# EAGLE board dengenver2.0 (EAGLE 9.6.2)
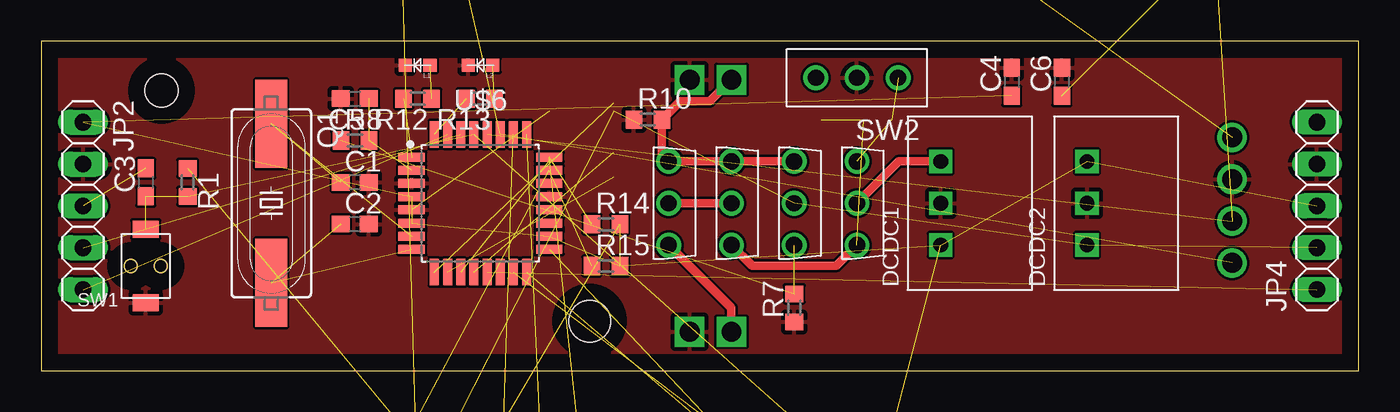
[diagram p0: board, top side]
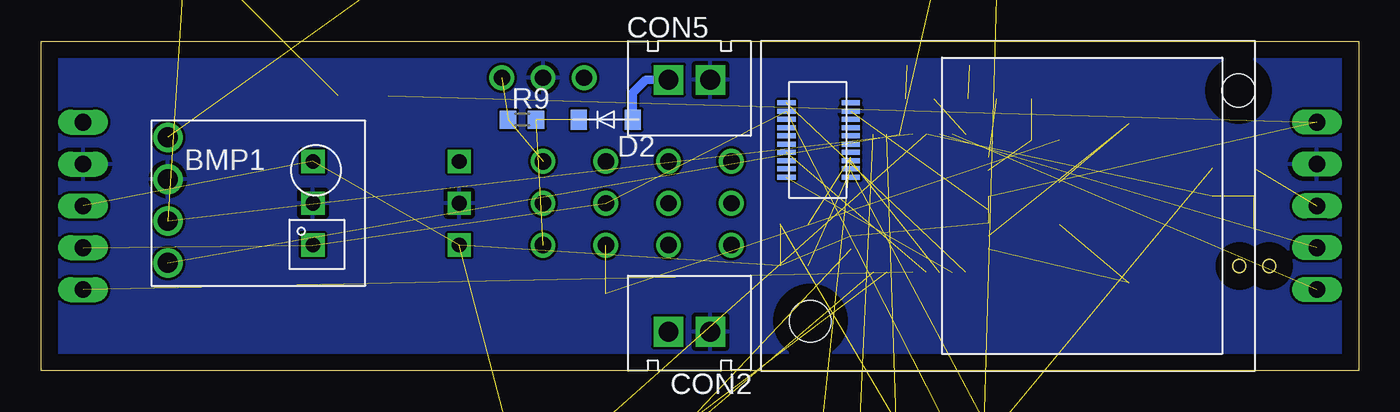
[diagram p1: board, bottom side, seen from below]

Size 80 x 20 mm. Coordinates in mm from the lower left corner, seen from the top.
Outline: 0,0 80,0 80,20 0,20 0,0
Copper layers (1*16): Top 0.035mm / dielectric 1.5mm / Bottom 0.035mm
Design rules "default": minimum track width 6mil, minimum drill 0.35mm, track to track 6mil, track to pad 6mil, pad to pad 6mil, via to via 6mil, smd to smd 6mil, copper to edge 40mil, drill to drill 6mil, minimum pad ring 10mil, minimum via ring 8mil, stop-mask expansion 4mil, vias tented up to drill 0mil, thermal gap 10mil
Net classes: 0 default: width 0.406 mm

## Footprints (pad centres in the part's own frame; a part is rotated, then mirrored left to right if it is on the bottom)
GY-68 = drill 1.2: P1 -5,4; P2 -5,1.46; P3 -5,-1.08; P4 -5,-3.62
C1608 = smd 1.1 x 1: 1 -0.85,0; 2 0.85,0
2PIN = drill 1.2 square: P$1 -1.27,0; P$2 1.27,0
SOD-123 = smd 0.97 x 1.22: A 1.64,0; C -1.64,0
5V1A_M78AR05-1 = drill 0.9 pad 1.27 square: GND 0,0; VIN 2.54,0; VOUT -2.54,0
3.3V1A_M78AR033-1 = drill 0.9 pad 1.27 square: GND 0,0; VIN 2.54,0; VOUT -2.54,0
IM920_IM920C = smd 0.3 x 1.1: $P1 -1.75,-13.45; $P2 -1.75,-9.55; $P3 -2.25,-13.45; $P4 -2.25,-9.55; $P5 -2.75,-13.45; $P6 -2.75,-9.55; $P7 -3.25,-13.45; $P8 -3.25,-9.55; $P9 -3.75,-13.45; $P10 -3.75,-9.55; $P11 -4.25,-13.45; $P12 -4.25,-9.55; $P13 -4.75,-13.45; $P14 -4.75,-9.55; $P15 -5.25,-13.45; $P16 -5.25,-9.55; $P17 -5.75,-13.45; $P18 -5.75,-9.55; $P19 -6.25,-13.45; $P20 -6.25,-9.55 | hole 2.5: 7,-12 | hole 2: -7,14
1X06 = drill 1.016 long: 1 -6.35,0; 2 -3.81,0; 3 -1.27,0; 4 1.27,0; 5 3.81,0; 6 6.35,0
1X05 = drill 1.016 long: 1 -5.08,0; 2 -2.54,0; 3 0,0; 4 2.54,0; 5 5.08,0
1X07 = drill 1.016 long: 1 -7.62,0; 2 -5.08,0; 3 -2.54,0; 4 0,0; 5 2.54,0; 6 5.08,0; 7 7.62,0
OSXX1608C1A = smd 0.8 x 0.8: AN -0.75,0; CT 0.75,0
HC49UP = smd 5.334 x 1.93: 1 -4.826,0; 2 4.826,0
R0603 = smd 1 x 1.1: 1 -0.85,0; 2 0.85,0
TVAF06-A020B-R = smd 1.6 x 1.05: P$1 0,2.225; P$2 0,-2.225
SRIDE_SWITCH = drill 1: L -2.5,0; LR 0,0; R 2.5,0
2SJ681 = drill 1: DRAIN 0,0; GATE 2.54,0; SOURCE -2.54,0
2SK4017 = drill 1: DRAIN 0,0; GATE 2.54,0; SOURCE -2.54,0
QFP80P900X900X120-32N = smd 1.6 x 0.547: ADC6 4.181,-1.2; ADC7 4.181,1.2; AREF 4.181,-0.4; AVCC 4.181,-2; GND1 -4.181,1.2; GND2 -4.181,-0.4; GND3 4.181,0.4; PB5 4.181,-2.8; PB6 -4.181,-2; PB7 -4.181,-2.8; PC0 4.181,2; PC1 4.181,2.8; PD3 -4.181,2.8; PD4 -4.181,2; VCC1 -4.181,0.4; VCC2 -4.181,-1.2 | smd 0.547 x 1.6: PB0 -0.4,-4.181; PB1 0.4,-4.181; PB2 1.2,-4.181; PB3 2,-4.181; PB4 2.8,-4.181; PC2 2.8,4.181; PC3 2,4.181; PC4 1.2,4.181; PC5 0.4,4.181; PC6 -0.4,4.181; PD0 -1.2,4.181; PD1 -2,4.181; PD2 -2.8,4.181; PD5 -2.8,-4.181; PD6 -2,-4.181; PD7 -1.2,-4.181

## Placement (x,y rotation side)
BMP1  BMP180  [GY-68]  67.31,10.16 0 bottom
C1  22p  [C1608]  19.05,11.43 0 top
C2  22p  [C1608]  19.05,8.89 0 top
C3  0.1μ  [C1608]  6.35,11.43 90 top
C4  3.3uF  [C1608]  58.93,17.53 90 top
C5  10uF  [C1608]  19.05,16.51 180 top
C6  3.3uF  [C1608]  61.98,17.53 90 top
CON2  [2PIN]  40.64,2.36 180 bottom
CON5  [2PIN]  40.64,17.65 0 bottom
D2  [SOD-123]  45.72,15.24 180 bottom
DCDC1  [5V1A_M78AR05-1]  54.61,10.16 90 top
DCDC2  [3.3V1A_M78AR033-1]  63.5,10.16 90 top
IM2  IM920_IM920C  [IM920_IM920C]  21.3,10 270 bottom
JP1  [1X06]  54.61,-16.51 0 top  (outside the outline)
JP2  [1X05]  2.54,10 270 top
JP3  [1X07]  27.94,-7.62 0 top  (outside the outline)
JP4  [1X05]  77.46,10 90 top
L1  [OSXX1608C1A]  22.86,18.54 180 top
L2  [OSXX1608C1A]  26.67,18.54 180 top
Q1  16mhz  [HC49UP]  13.97,10.16 270 top
R1  10k  [R0603]  8.89,11.43 270 top
R4  10k  [R0603]  20.32,50.8 0 top  (outside the outline)
R7  10k  [R0603]  45.72,3.81 90 top
R8  1k  [R0603]  19.05,13.97 0 top
R9  100k  [R0603]  50.8,15.24 0 bottom
R10  1k  [R0603]  36.83,15.24 0 top
R11  10k  [R0603]  71.12,26.67 270 top  (outside the outline)
R12  100  [R0603]  22.86,16.51 180 top
R13  100  [R0603]  26.67,16.51 180 top
R14  4.7k  [R0603]  34.29,8.89 0 top
R15  4.7k  [R0603]  34.29,6.35 0 top
SW1  [TVAF06-A020B-R]  6.35,6.35 180 top
SW2  SRIDE_SWITCH  [SRIDE_SWITCH]  49.53,17.78 180 top
U$2  2SJ681-PCH  [2SJ681]  38.1,10.16 90 top
U$3  2SK4017-NCH  [2SK4017]  45.72,10.16 90 top
U$4  2SJ681-PCH  [2SJ681]  41.91,10.16 90 top
U$5  2SJ681-PCH  [2SJ681]  49.53,10.16 90 top
U$6  ATMEGA328P-AU  [QFP80P900X900X120-32N]  26.67,10.16 0 top

## Library data of the parts
BMP1 = BMP180
C1-C6 = rcl; SPICEPREFIX: C
CON2 CON5 = XR Connector
D2 = ChipDiodes
DCDC1 DCDC2 = DC-DC
IM2 = CANSAT12th
JP1-JP4 = pinhead
L1 L2 = Chip LED
Q1 = crystal; OC_FARNELL: unknown; OC_NEWARK: unknown
R1 R4 R7-R15 = rcl; SPICEPREFIX: R
SW1 = Tact switch
SW2 = Sride Switch
U$2-U$5 = mosfet
U$6 = ATMEGA328P-AU

## Nets
+3V3: BMP1.P1 C6.1 DCDC2.VOUT IM2.$P17 JP3.2 JP4.2 R4.2 R11.2 U$3.DRAIN
+5V: C4.1 DCDC1.VOUT DCDC2.VIN JP1.1 JP2.1 JP3.3 JP4.3 R1.1 R14.2 R15.2 U$6.AVCC U$6.VCC1 U$6.VCC2
+5V1: DCDC1.VIN U$5.DRAIN
BORD1: JP4.5
BORD2: JP4.1 U$6.PB1
BORDRX: JP3.4 U$6.PC3
BORDTX: JP3.5 U$6.PC2
FP: CON5.P$1 D2.C R10.2 U$2.GATE U$3.GATE U$4.GATE
FP_CHECKER: C5.1 R8.2 U$6.PD4
GND: BMP1.P2 C1.2 C2.2 C4.2 C5.2 C6.2 CON2.P$1 CON5.P$2 DCDC1.GND DCDC2.GND IM2.$P18 JP1.2 JP2.2 JP3.7 JP4.4 L1.CT L2.CT R7.1 R10.1 SW1.P$1 SW2.LR U$6.GND1 U$6.GND2 U$6.GND3
IM_BUSY: IM2.$P1 U$6.PD6
IM_RESET: IM2.$P19 U$6.PD5
LED: IM2.$P15
LED1.0: R13.2 U$6.PD2
LED1.1: R12.2 U$6.PD3
MISO: JP1.4 U$6.PB4
MOSI: JP1.5 U$6.PB3
N$1: C2.1 Q1.2 U$6.PB7
N$2: U$2.DRAIN U$4.DRAIN
N$3: D2.A R9.2 U$4.SOURCE U$5.SOURCE
N$9: L2.AN R13.1
N$10: L1.AN R12.1
N$12: C1.1 Q1.1 U$6.PB6
N$14: R7.2 R8.1 U$3.SOURCE
RAW: CON2.P$2 U$2.SOURCE
RESET: C3.2 JP2.3
RESETB: C3.1 JP1.6 R1.2 SW1.P$2 U$6.PC6
RX: JP2.4 U$6.PD0
RX_IM: IM2.$P6 U$6.PD7
SCK: JP1.3 U$6.PB5
SCL: BMP1.P3 R11.1 U$6.PC5
SDA: BMP1.P4 R4.1 U$6.PC4
SERVO: JP3.6 R14.1 U$6.PC1
SERVO2: JP3.1 R15.1 U$6.PC0
SS: U$6.PB2
SW: R9.1 SW2.L U$5.GATE
TX: JP2.5 U$6.PD1
TX_IM: IM2.$P7 U$6.PB0

## Tracks (layer width: path | path; a pad name or v marks a point on that pad's centre or on a via)
+3V3  (8 unrouted)
+5V  (12 unrouted)
+5V1
  Top 0.508: U$5.DRAIN 52.07,12.7 DCDC1.VIN
BORD2  (1 unrouted)
BORDRX  (1 unrouted)
BORDTX  (1 unrouted)
FP
  Top 0.508: U$3.GATE U$4.GATE U$2.GATE 37.68,13.12 R10.2 38.79,16.35 40.6,16.35 CON5.P$1
  Bottom 0.508: D2.C 44.08,16.88 43.31,17.65 CON5.P$1
FP_CHECKER  (2 unrouted)
GND  (1 unrouted)
  pour Top: -49.53,-29.21 -83.82,5.08 -83.82,50.8 -83.82,71.12 -60.96,93.98 60.96,93.98 106.68,48.26 106.68,8.89 73.66,-24.13 68.58,-29.21 -48.26,-29.21
  pour Bottom: -49.53,-29.21 -83.82,5.08 -83.82,71.12 -60.96,93.98 59.69,93.98 60.96,93.98 106.68,48.26 106.68,8.89 68.58,-29.21
IM_BUSY  (1 unrouted)
IM_RESET  (1 unrouted)
LED1.0  (1 unrouted)
LED1.1  (1 unrouted)
MISO  (1 unrouted)
MOSI  (1 unrouted)
N$1  (2 unrouted)
N$2
  Top 0.508: U$2.DRAIN U$4.DRAIN
N$3  (2 unrouted)
  Top 0.508: U$4.SOURCE 43.18,6.35 48.26,6.35 U$5.SOURCE
N$9  (1 unrouted)
N$10  (1 unrouted)
N$12  (2 unrouted)
N$14  (2 unrouted)
RAW
  Top 0.508: U$2.SOURCE 41.91,3.81 CON2.P$2
RESET  (1 unrouted)
RESETB  (4 unrouted)
RX  (1 unrouted)
RX_IM  (1 unrouted)
SCK  (1 unrouted)
SCL  (2 unrouted)
SDA  (2 unrouted)
SERVO  (2 unrouted)
SERVO2  (2 unrouted)
SW  (2 unrouted)
TX  (1 unrouted)
TX_IM  (1 unrouted)